# Altium PCB PCB1 (1).PcbDoc
Units mm, origin at the board's own origin, x right, y up, seen from the top; angles counter-clockwise.
Board outline 152.4 x 101.6 mm, 4 copper layers (Top Layer, +5 V, -5 V, GND), stack 1.615 mm thick; 59 components, 31 nets, 169 pads, 52 vias.
Unrouted connection lines stored in the file: 41.
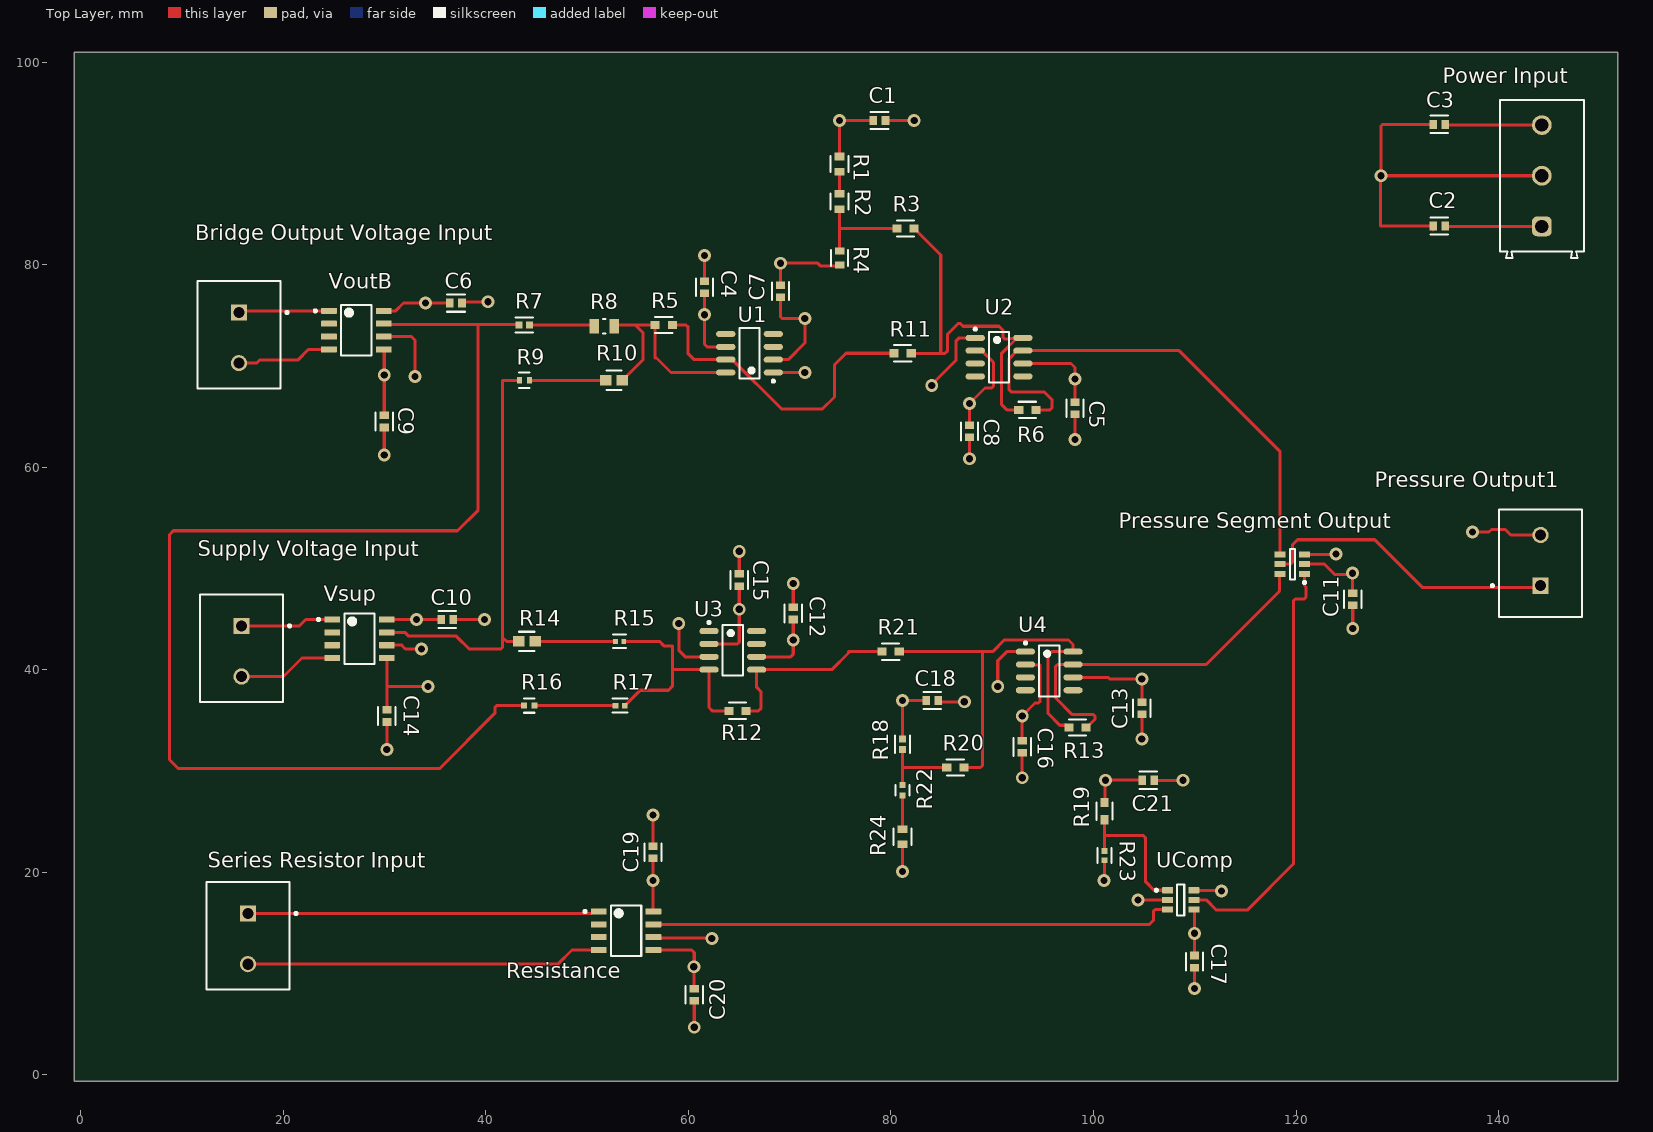
[diagram p0: Top Layer view]
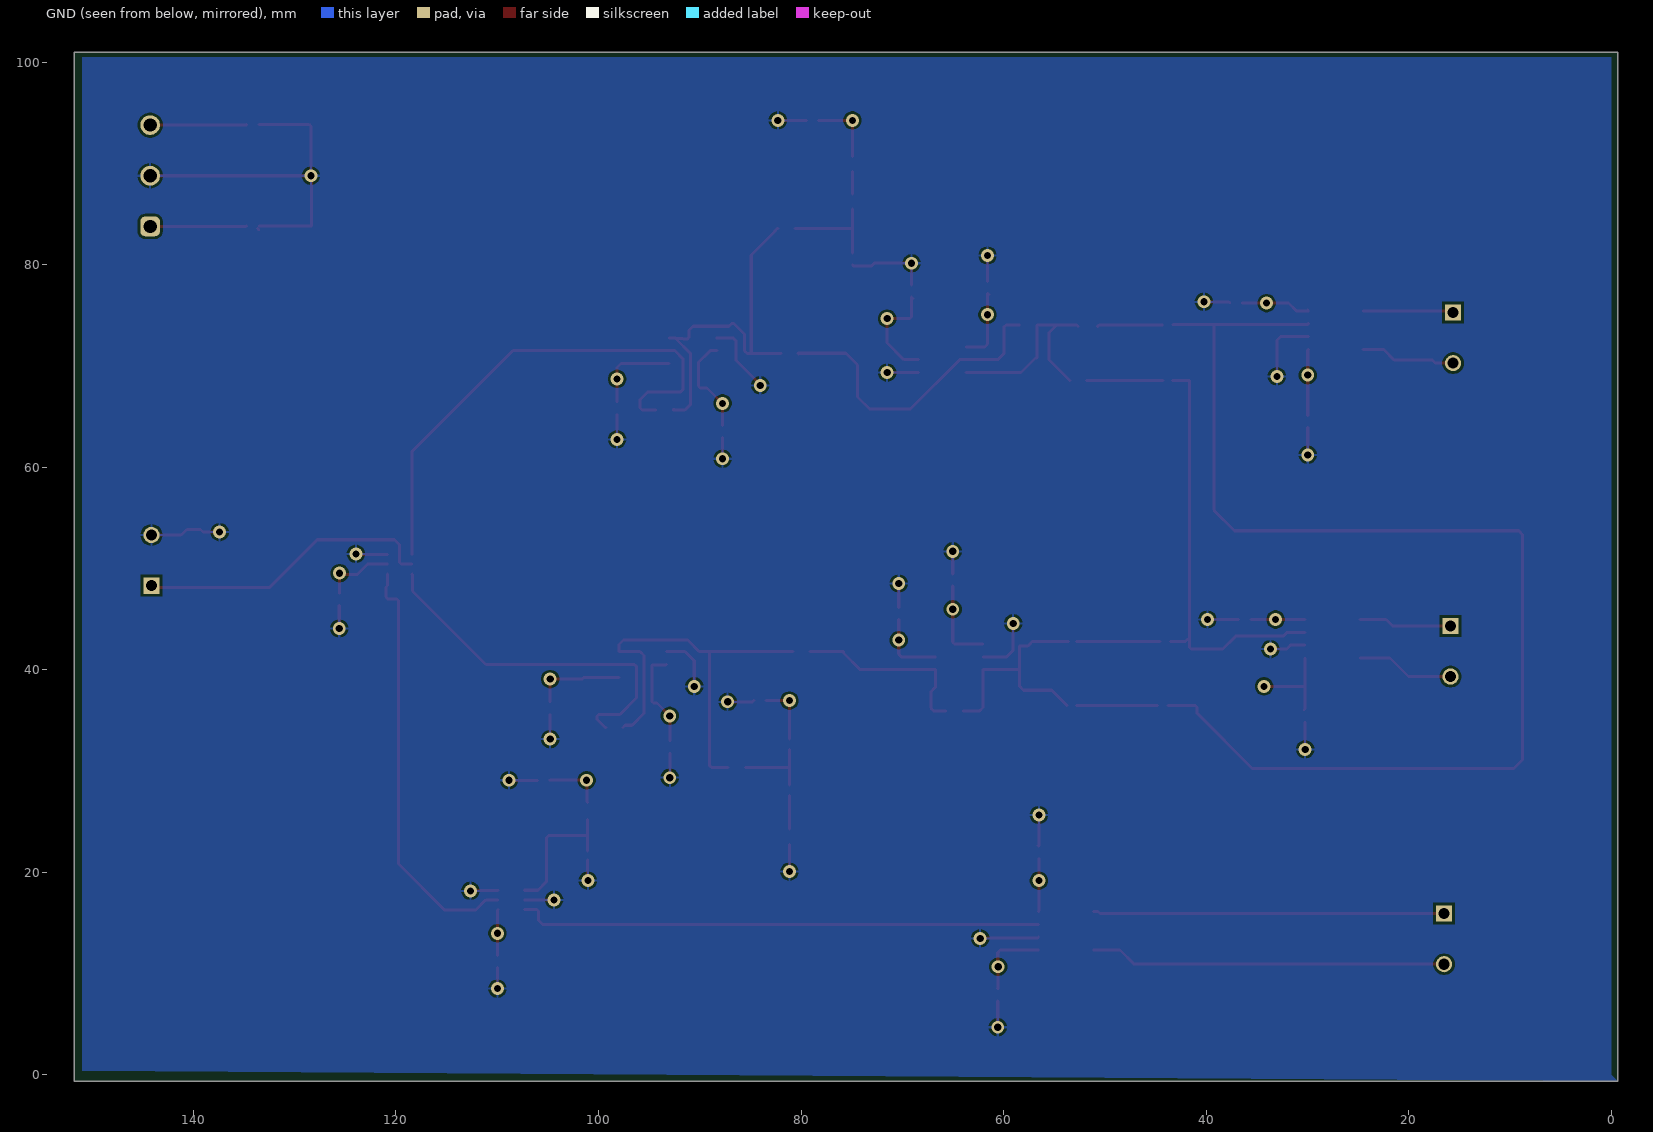
[diagram p1: GND view, seen from below]
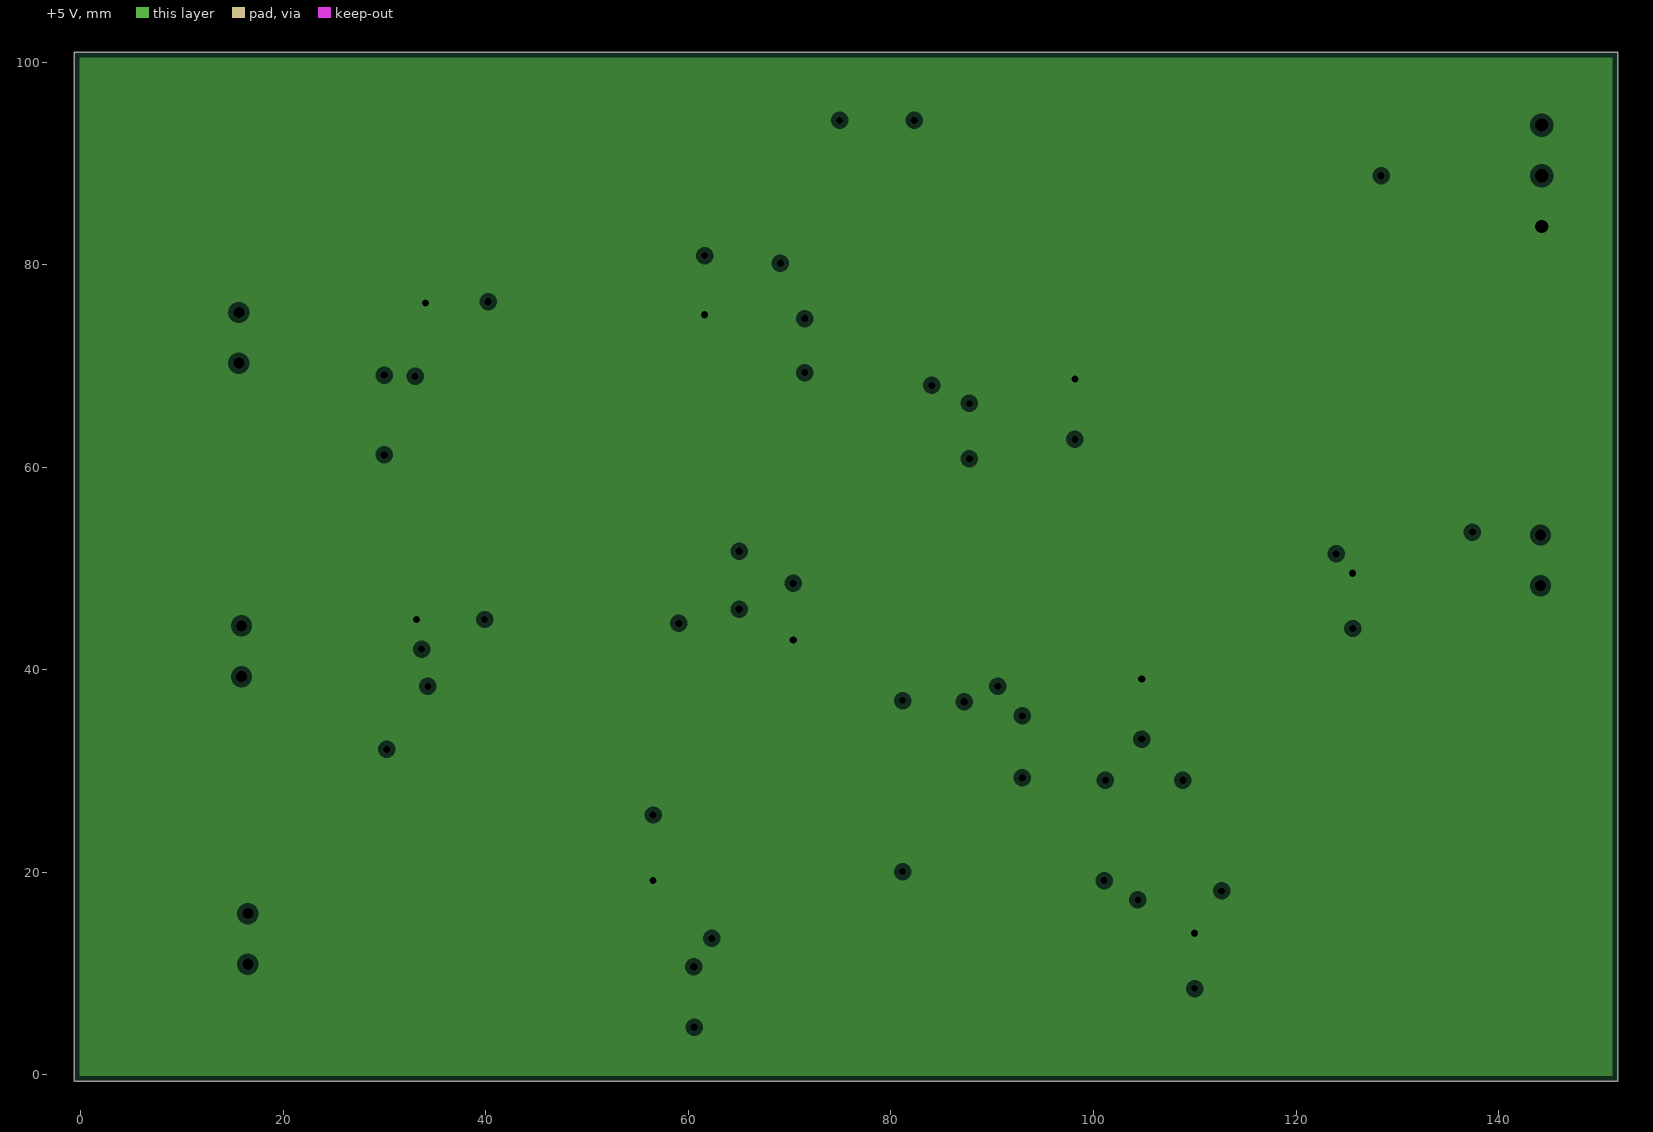
[diagram p2: +5 V, clearances drawn from the general rule]
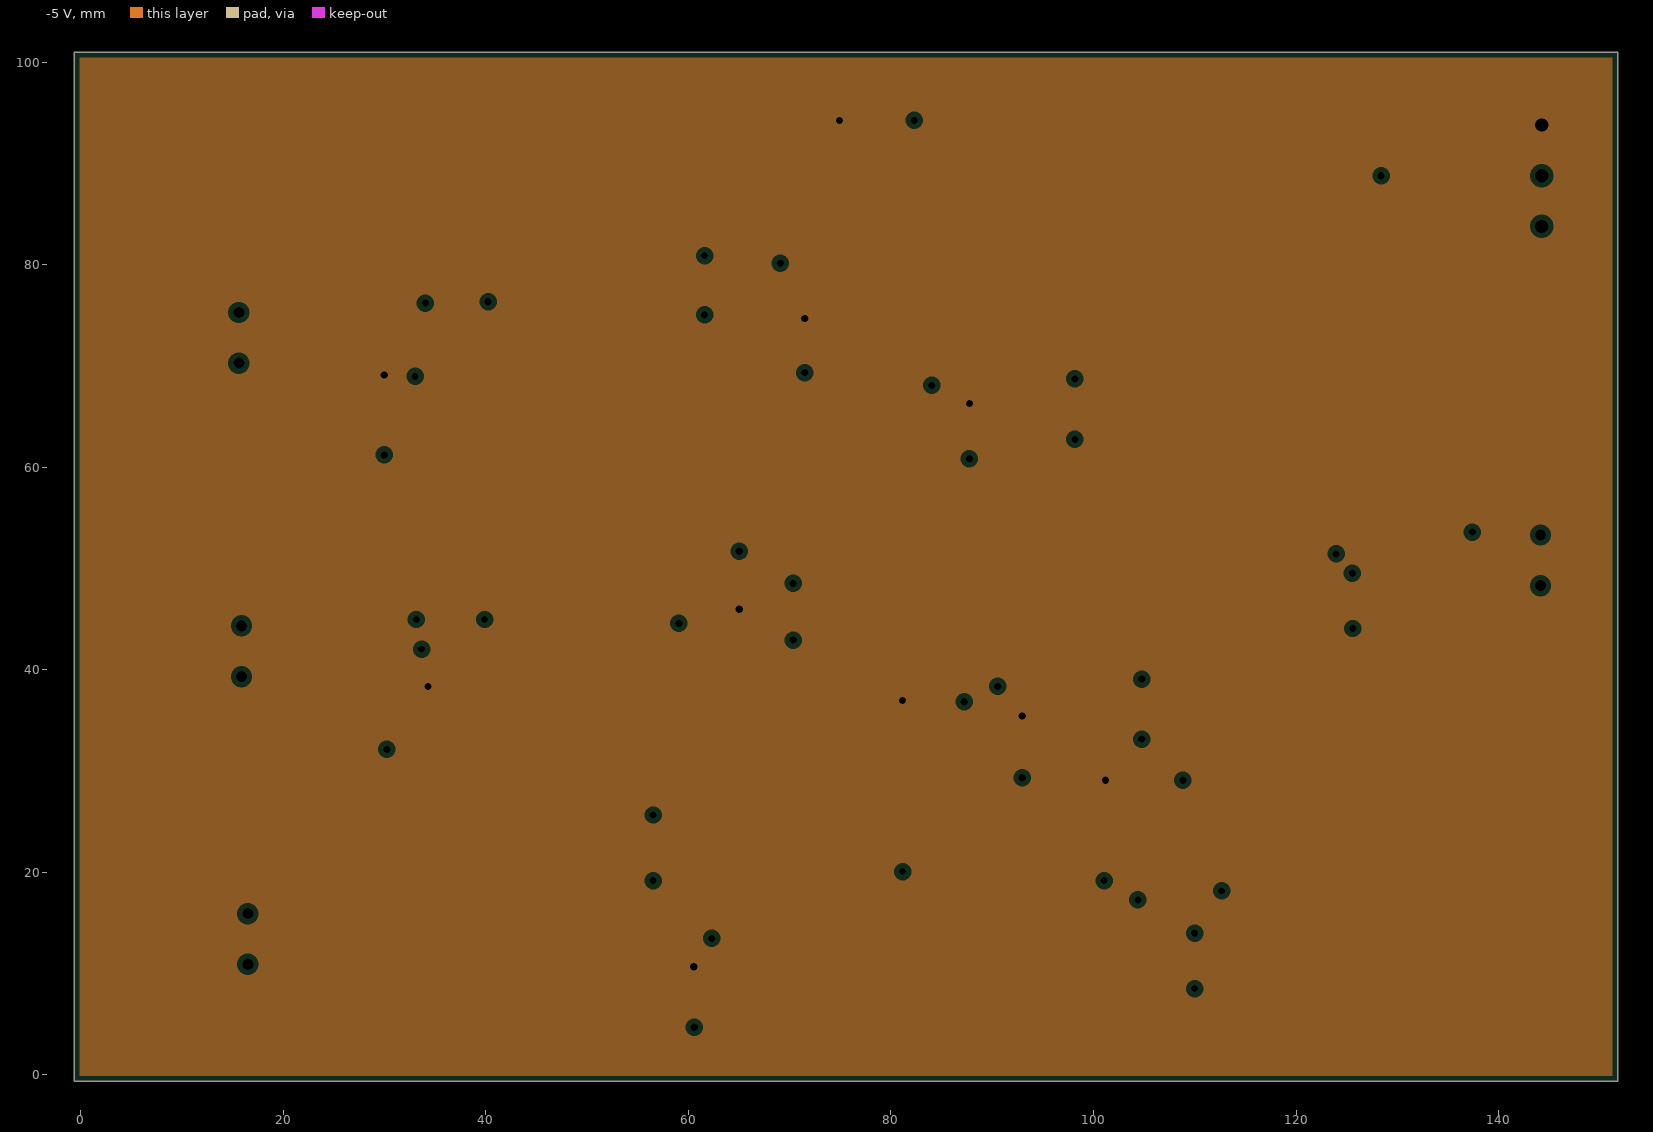
[diagram p3: -5 V, clearances drawn from the general rule]
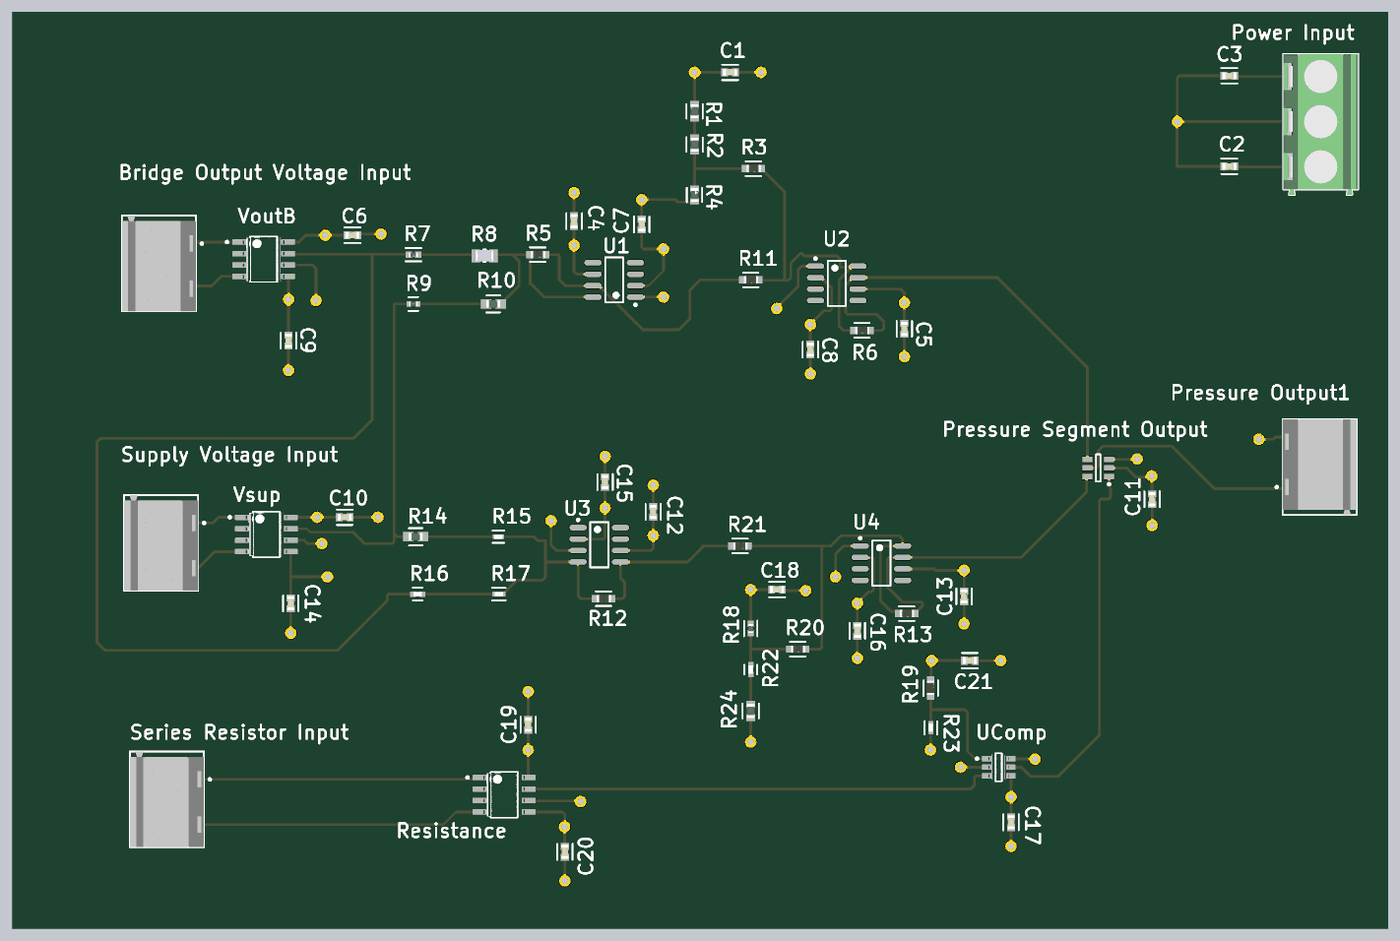
[diagram p4: 3D render of the assembled board from above, using the file's embedded part models]

## Layer stack, top to bottom
Top Solder: solder mask 0.0102, Solder Resist, Dk 3.5
Top Layer: signal copper 0.0356
Dielectric 2: prepreg 0.137, PP-006, Dk 4.29
+5 V: plane copper 0.035, net +5
Dielectric 1: dielectric 1.2, FR-4, Dk 4.8
-5 V: plane copper 0.035, net -5
Dielectric 3: prepreg 0.137, PP-006, Dk 4.29
GND: signal copper 0.0356
Bottom Solder: solder mask 0.0102, Solder Resist, Dk 3.5

## Board outline
-0.635,-0.635 151.765,-0.635 151.765,100.965 -0.635,100.965

## Design rules (kind name [scope] priority, off if disabled: settings)
Clearance [All] p1: gap=0.254 ignorepadtopadclearanceinfootprint=FALSE
MinimumSolderMaskSliver [All] p1: minsoldermaskwidth=0.1
PlaneClearance [All] p1: clearance=0.508
PlaneConnect [All] p1: planeconnectstyle=Relief reliefexpansion=0.508 reliefentries=4 reliefconductorwidth=0.254 reliefairgap=0.254
PolygonConnect [All] p1: connectstyle=Relief reliefconductorwidth=0.254 reliefentries=4 polygonreliefangle="90 Angle" airgapwidth=0.254
RoutingVias [All] p1: holewidth=0.711 width=1.27 viastyle="Through Hole" minholewidth=0.711 minwidth=1.27 maxholewidth=0.711 maxwidth=1.27
SolderMaskExpansion [All] p1: expansion=0.102 istentingtop=FALSE
Width [All] p1: maxlimit=0.4 minlimit=0.254 preferedwidth=0.3
27 further rules are at their usual default settings.

## Components (designator, comment, footprint, x,y, rotation, side; value= is the part's Value field where it differs from the comment)
"Bridge Output Voltage Input" "282836-2" TECO-282836-2_V 15.621,72.771 r270 top
C1 "0.1uf" FP-C0603C-CF-MFG 78.867,94.234 r0 top value="0.10 μF"
C2 "0.1uf" FP-C0603C-CF-MFG 134.147,83.82 r180 top value="0.10 μF"
C3 "0.1uf" FP-C0603C-CF-MFG 134.147,93.853 r180 top value="0.10 μF"
C4 "0.1uf" FP-C0603C-CF-MFG 61.595,77.759 r90 top value="0.10 μF"
C5 "0.1uf" FP-C0603C-CF-MFG 98.171,65.821 r270 top value="0.10 μF"
C6 "0.1uf" FP-C0603C-CF-MFG 37.049,76.2 r0 top value="0.10 μF"
C7 "0.1uf" FP-C0603C-CF-MFG 69.088,77.378 r90 top value="0.10 μF"
C8 "0.1uf" FP-C0603C-CF-MFG 87.757,63.535 r270 top value="0.10 μF"
C9 "0.1uf" FP-C0603C-CF-MFG 29.972,64.516 r270 top value="0.10 μF"
C10 "0.1uf" FP-C0603C-CF-MFG 36.195,44.958 r0 top value="0.10 μF"
C11 "0.1uf" FP-C0603C-CF-MFG 125.603,46.955 r270 top value="0.10 μF"
C12 "0.1uf" FP-C0603C-CF-MFG 70.358,45.558 r90 top value="0.10 μF"
C13 "0.1uf" FP-C0603C-CF-MFG 104.775,36.195 r270 top value="0.10 μF"
C14 "0.1uf" FP-C0603C-CF-MFG 30.226,35.433 r270 top value="0.10 μF"
C15 "0.1uf" FP-C0603C-CF-MFG 65.024,48.86 r90 top value="0.10 μF"
C16 "0.1uf" FP-C0603C-CF-MFG 92.964,32.385 r270 top value="0.10 μF"
C17 "0.1uf" FP-C0603C-CF-MFG 109.982,11.176 r270 top value="0.10 μF"
C18 "0.1uf" FP-C0603C-CF-MFG 84.074,36.957 r0 top value="0.10 μF"
C19 "0.1uf" FP-C0603C-CF-MFG 56.515,21.971 r90 top value="0.10 μF"
C20 "0.1uf" FP-C0603C-CF-MFG 60.579,7.909 r270 top value="0.10 μF"
C21 "0.1uf" FP-C0603C-CF-MFG 105.41,29.083 r0 top value="0.10 μF"
"Power Input" "691213710003" 691213710003 144.272,88.773 r90 top
"Pressure Output1" "282836-2" TECO-282836-2_V 144.145,50.8 r90 top
"Pressure Segment Output" "ADG819BRTZ-REEL7" ADI-RJ-6_N 119.634,50.419 r180 top
R1 "200" FP-CRCW0603-e3-MFG 74.93,89.928 r90 top value=200R
R2 "130" FP-CRCW0603-e3-MFG 74.93,86.233 r90 top value=130R
R3 "10k" FP-RT0603-MFG 81.446,83.566 r0 top value=10KΩ
R4 "4700" FP-MCT0603-MFG 74.93,80.651 r90 top
R5 "10k" FP-RT0603-MFG 57.57,74.041 r0 top value=10KΩ
R6 "10k" FP-RT0603-MFG 93.472,65.659 r0 top value=10KΩ
R7 "1.2k" FP-RG1005-IPC_A 43.809,74.041 r0 top value=1.2kR
R8 "30" FP-CRCW0805-e3-MFG 51.689,73.914 r0 top value=30Ω
R9 "11300" FP-RP73P-1E-MFG 43.806,68.58 r0 top value=11.3Ω
R10 "10" FP-CRCW0603-e3-IPC_A 52.652,68.58 r0 top value=10R
R11 "10k" FP-RT0603-MFG 81.153,71.247 r0 top value=10KΩ
R12 "10k" FP-RT0603-MFG 64.858,35.941 r0 top value=10KΩ
R13 "10k" FP-RT0603-MFG 98.425,34.29 r0 top value=10KΩ
R14 "23200" FP-CRCW0603-e3-IPC_A 44.052,42.799 r0 top value=10R
R15 "20" FP-CRCW0402-e3-IPC_C 53.213,42.799 r0 top value=20R
R16 "1k" FP-CRCW0402-e3-MFG 44.275,36.449 r0 top value=1kR
R17 "160" FP-CRCW0402-e3-IPC_B 53.269,36.449 r0 top value=160R
R18 "1.2k" FP-RG1005-IPC_A 81.153,32.639 r90 top value=1.2kR
R19 "10k" FP-RT0603-MFG 101.092,26.035 r90 top value=10KΩ
R20 "10k" FP-RT0603-MFG 86.36,30.353 r0 top value=10KΩ
R21 "10k" FP-RT0603-MFG 79.971,41.783 r0 top value=10KΩ
R22 "1k" FP-CRCW0402-e3-MFG 81.153,28.084 r90 top value=1kR
R23 "160" FP-CRCW0402-e3-IPC_B 101.092,21.646 r90 top value=160R
R24 "130" FP-CRCW0603-e3-MFG 81.153,23.507 r270 top value=130R
Resistance "INA819IDR" FP-D0008A-MFG 53.848,14.224 r0 top
"Series Resistor Input" "282836-2" TECO-282836-2_V 16.51,13.422 r270 top
"Supply Voltage Input" "282836-2" TECO-282836-2_V 15.875,41.823 r270 top
U1 "OP727ARZ" ADI-R-8_L 66.04,71.247 r180 top
U2 "OP727ARZ" ADI-R-8_L 90.678,70.866 r0 top
U3 "OP727ARZ" ADI-R-8_L 64.389,41.91 r0 top
U4 "OP727ARZ" ADI-R-8_L 95.631,39.878 r0 top
UComp "TLV3501AIDBVT" FP-DBV0006A-MFG 108.615,17.272 r0 top
VoutB "INA819IDR" FP-D0008A-MFG 27.211,73.533 r0 top
Vsup "INA819IDR" FP-D0008A-MFG 27.526,43.053 r0 top

## Footprints (in the part's own frame and the unit in brackets; to place one, negate y for a bottom-side part, rotate by r counter-clockwise, add the part's x,y. Pads: shape width x height; smd on the part's side, far side on the other; paste and mask are expansions set on the pad)
691213710003 [mm] "5,00mm - modular - green - Horizontal entry with rising cage clamp -  10,0mm height - 03p"
  rrect50% 1.95x1.95 hole 1.3: 1(-5,0)
  round 1.95 hole 1.3: 2(0,0) 3(5,0)
  silkscreen extent -8.1,-4.15 7.5,4.15, body extent -8.1,-4.15 7.5,4.15, height 10.05
ADI-R-8_L [mm] "SOIC, 8-Leads, Body 4.9x3.9mm, Pitch 1.27mm, IPC High Density"
  oval 1.9x0.6 smd: 1(-2.35,1.905) 2(-2.35,0.635) 3(-2.35,-0.635) 4(-2.35,-1.905) 5(2.35,-1.905) 6(2.35,-0.635) 7(2.35,0.635) 8(2.35,1.905)
  silkscreen extent -2.48,-2.5 1,2.88, body extent -2,-2.5 2,2.5, height 1.75
ADI-RJ-6_N [mm] "SOT23, 6-Leads, Body 2.9x1.6mm, Pitch 0.95mm, IPC Medium Density"
  rect 1.1x0.6 smd: 1(-1.2,0.95) 2(-1.2,0) 3(-1.2,-0.95) 4(1.2,-0.95) 5(1.2,0) 6(1.2,0.95)
  silkscreen extent -1.33,-1.5 0.25,1.92, body extent -0.85,-1.5 0.85,1.5, height 1.45
FP-C0603C-CF-MFG [mm]
  rect 0.75x0.9 smd paste+0 mask+0: 1(-0.6,0) 2(0.6,0)
  silkscreen extent -0.87,-0.85 0.88,0.85, body extent -1.2,-0.6 1.2,0.6, height 0.25
FP-CRCW0402-e3-IPC_B [mm]
  rect 0.568x0.572 smd paste+0 mask+0: 1(-0.452,0) 2(0.452,0)
  silkscreen extent -0.74,-0.69 0.74,0.69, body extent -0.89,-0.44 0.89,0.44, height 0.25
FP-CRCW0402-e3-IPC_C [mm]
  rect 0.468x0.472 smd paste+0 mask+0: 1(-0.402,0) 2(0.402,0)
  silkscreen extent -0.64,-0.67 0.64,0.67, body extent -0.74,-0.38 0.74,0.38, height 0.25
FP-CRCW0402-e3-MFG [mm]
  rect 0.6x0.6 smd paste+0 mask+0: 1(-0.525,0) 2(0.525,0)
  silkscreen extent -0.52,-0.7 0.53,0.7, body extent -0.92,-0.4 0.92,0.4, height 0.25
FP-CRCW0603-e3-IPC_A [mm]
  rect 1.135x1.062 smd paste+0 mask+0: 1(-0.815,0) 2(0.815,0)
  silkscreen extent -0.75,-0.95 0.75,0.95, body extent -1.88,-1.03 1.88,1.03, height 0.25
FP-CRCW0603-e3-MFG [mm]
  rect 0.75x1 smd paste+0 mask+0: 1(-0.75,0) 2(0.75,0)
  silkscreen extent -0.8,-0.9 0.8,0.9, body extent -1.22,-0.6 1.22,0.6, height 0.25
FP-CRCW0805-e3-MFG [mm]
  rect 0.95x1.45 smd paste+0 mask+0: 1(-0.975,0) 2(0.975,0)
  silkscreen extent -0.13,-0.7 0.13,0.7, body extent -1.55,-0.82 1.55,0.82, height 0.25
FP-D0008A-MFG [mm]
  rrect17% 1.55x0.6 smd paste+0 mask+0: 1(-2.7,1.905) 2(-2.7,0.635) 3(-2.7,-0.635) 4(-2.7,-1.905) 5(2.7,-1.905) 6(2.7,-0.635) 7(2.7,0.635) 8(2.7,1.905)
  silkscreen extent -4.17,-2.5 1.5,2.5, body extent -3.57,-2.75 3.57,2.75, height 0.25
FP-DBV0006A-MFG [mm]
  rrect17% 1.1x0.6 smd paste+0 mask+0: 1(-1.3,0.95) 2(-1.3,0) 3(-1.3,-0.95) 4(1.3,-0.95) 5(1.3,0) 6(1.3,0.95)
  silkscreen extent -2.52,-1.53 0.35,1.53, body extent -1.95,-1.78 1.95,1.78, height 0.25
FP-MCT0603-MFG [mm]
  rect 0.7x0.95 smd paste+0 mask+0: 1(-0.675,0) 2(0.675,0)
  silkscreen extent -0.8,-0.85 0.8,0.85, body extent -1.12,-0.58 1.12,0.58, height 0.25
FP-RG1005-IPC_A [mm]
  rect 0.689x0.672 smd paste+0 mask+0: 1(-0.514,0) 2(0.514,0)
  silkscreen extent -0.86,-0.74 0.86,0.74, body extent -1.06,-0.54 1.06,0.54, height 0.25
FP-RP73P-1E-MFG [mm]
  rect 0.5x0.6 smd paste+0 mask+0: 1(-0.5,0) 2(0.5,0)
  silkscreen extent -0.53,-0.77 0.53,0.75, body extent -0.85,-0.4 0.85,0.4, height 0.25
FP-RT0603-MFG [mm]
  rect 0.9x0.8 smd paste+0 mask+0: 1(-0.85,0) 2(0.85,0)
  silkscreen extent -0.85,-0.81 0.86,0.8, body extent -1.4,-0.55 1.4,0.55, height 0.25
TECO-282836-2_V [mm] "Female Header, Pitch 5mm, 1 x 2 Position, Height 10mm"
  rect 1.6x1.6 hole 1.1: 1(-2.5,0)
  round 1.6 hole 1.1: 2(2.5,0)
  silkscreen extent -5.6,-4.1 5,4.88, body extent -5.6,-4.1 5,4.1, height 10

## Part data
"Bridge Output Voltage Input" "Pressure Output1" "Series Resistor Input" "Supply Voltage Input": library part CMP-1684-00017-1, "Female Header, Pitch 5 mm, 1 x 2 Position, Height 10 mm, Tail Length 3.5 mm, Rohs, Bulk", Color=Green, Current=13.5A, Manufacturer="TE Connectivity", Package Description="Female Header, Pitch 5 mm, 1 x 2 Position, Height 10 mm, Tail Length 3.5 mm", Package Reference=THD, Standard Package=300, Voltage=300V, 3D Model=282836-2.pdf, Category=Connectors,Interconnects, Clamp Material - Plating=Brass-NickelPlated, Contact Material - Plating=Brass-TinPlated, Datasheet URL=http://www.te.com.cn/commerce/DocumentDelivery/DDEController?Action=showdoc&DocId=Catalog+Section%7F1308389_EUROSTYLE_TERMINAL_BLOCKS%7F0607%7Fpdf%7FEnglish%7FENG_CS_1308389_EUROSTYLE_TERMINAL_BLOCKS_0607.pdf%7F282836-2, Dynamic Catalog=BuchananSeries, Family=TerminalBlocks-WiretoBoard, Featured Product=EurostyleTerminalBlockConnectors, Features=Interlocking(Side), Housing Material=Polyamide(PA66),Nylon6/6, Manufacturer URL=http://www.te.com, Mating Orientation=HorizontalwithBoard, Mounting Type=ThroughHole, Number of Levels=1, Other Names="5ULV-02B / A98076", Packaging=Bulk, Pitch="0.197\"(5.00mm)", Positions Per Level=2, Product Training Modules=Wire-to-BoardEurostyleTerminalBlocks, RoHS Information=282836-2StatementofCompliance, Screw Material - Plating=Brass-NickelPlated, Screw Thread=M3, Series=Buchanan, Torque - Screw=0.68Nm(6Lb-In), Wire Gauge=16-30AWG, Wire Termination=Screw-RisingCageClamp
C1 C2 C3 C4 C5 C6 C7 C8 C9 C10 C11 C12 C13 C14 C15 C16 C17 C18 C19 C20 C21: library part CMP-2006-03061-2, "CAP CER 0.1UF 50V X7R 0603", Capacitance="0.10 μF", Manufacturer=KEMET, Manufacturer Part Number=C0603C104K5RACTU, Package=C0603C-CF, Temperature="-55°C to +125°C", Temperature Characteristic=X7R, Temperature Coefficient=30ppm/°C, Temperature Range High=+125°C, Temperature Range Low=-55°C, Tolerance=0.1, Voltage Rating="50 V", Automotive=Yes, Automotive Grade="Grade 1", Category=Cap, ComponentLink2Description=Datasheet, ComponentLink2URL=https://api.kemet.com/component-edge/download/datasheet/C0603C100J5GACAUTO.pdf, Device Class L1="Passive Components", Device Class L2=Capacitors, Device Class L3="Ceramic Capacitors", Digikey Description="CAP CER 0.1UF 50V X7R 0603", Height=0.87mm, Lead Free=Yes, Material=Ceramic, Octopart=https://octopart.com/c0603c104k5ractu-kemet-139244, RoHS=TRUE
"Power Input": library part CMP-1502-02527-2, Color=Green, Current=10A, Max Operating Temperature=105°C, Min Operating Temperature=-40°C, Voltage=300V, Connector Type="PCB, Terminal Block", Contact Material=Brass, Contact Plating=Tin, Height=10mm, Housing Material=Nylon, Lead Pitch=5mm, Length=8.3mm, Mount="Through Hole", NexarPartId=8917719, Number of Contacts=3, Number of Levels=1, Number of Pins=3, Number of Positions Per Level=3, Packaging=Box, Pitch=5.0038mm, Plating="Brass, Steel", REACH SVHC=Unknown, RoHS=Compliant, Stripping Length=-7mm, Termination=Screw, Width=15.6mm, Wire Gauge (Max)=26AWG, Wire Gauge (Min)=16AWG, Wire/Cable Gauge=16AWG
"Pressure Segment Output": library part CMP-0790-00095-1, "0.5 Ohm, CMOS, 1.8 to 5.5 V, 2:1 Mux / SPDT Switch, -40 to 125 degC, 6-pin SOT23 (RJ-6), Reel", Manufacturer="Analog Devices", Power Dissipation=5uW, # Sw Functions=1, Code_JEDEC=MO-178-AB, ComponentLink1Description="Manufacturer URL", ComponentLink1URL=http://www.analog.com/en/index.html, ComponentLink2Description=Datasheet, ComponentLink2URL=http://www.analog.com/static/imported-files/data_sheets/ADG819.pdf, ComponentLink3Description="Package Specification", ComponentLink3URL=http://www.analog.com/static/imported-files/packages/PKG_PDF/SOT-23(RJ)/RJ_6.pdf, Configuration=SPDT, DatasheetVersion=02-03-2012-A, Id, Is (ON)="10pA, 10pA", Is OFF="10pA, 10pA", Max Pos Supply=5.5V, Min Pos Supply=1.8V, Mounting Technology="Surface Mount", PackageDescription="6-Pin Small Outline Transistor Package, Body 2.9 x 1.6 mm, Pitch 0.95 mm", PackageReference=RJ-6, PackageVersion="121608-A, 12/2008", Packing=Reel, PartNumber=ADG819BRTZ-REEL7, Ron (ohms)=0.5
R1: library part CMP-2000-03062-2, "RES Thick Film, 200Ω, 1%, 0.1W, 100ppm/°C, 0603", Case Code (Imperial)=0603, Case Code (Metric)=1608, Max Operating Temperature=155°C, Min Operating Temperature=-55°C, Package Quantity=5000, Power Rating=100mW, Resistance=200R, Temperature Coefficient=100ppm/°C, Tolerance=1%, Voltage Rating=75V, Case/Package=0603, Composition="Thick Film", Contact Plating=Tin, Depth=0.85mm, Height=0.45mm, Lead Free="Lead Free", Length=1.55mm, Military Standard=Not, Number of Pins=2, Packaging="Tape and Reel", Termination=SMD/SMT, Voltage Rating (DC)=75V, Weight=7.1E-05oz, Width=0.85mm
R2 R24: library part CMP-2000-03889-2, "RES Thick Film, 130Ω, 1%, 0.1W, 100ppm/°C, 0603", Case Code (Imperial)=0603, Case Code (Metric)=1608, Max Operating Temperature=155°C, Max Power Dissipation=100mW, Min Operating Temperature=-55°C, Package Quantity=10, Resistance=130R, Temperature Coefficient=100ppm/°C, Tolerance=1%, Voltage Rating=75V, Case/Package=0603, Composition="Thick Film", Contact Plating=Tin, Depth=0.85mm, Features="Automotive AEC-Q200", Height=0.45mm, Lead Free="Lead Free", Length=1.55mm, Military Standard=Not, Number of Pins=2, Number of Terminations=2, Packaging="Tape and Reel", Power Rating=100mW, Radiation Hardening=No, Termination=SMD/SMT, Voltage Rating (DC)=75V, Weight=7.1E-05oz, Width=0.85mm, Working Voltage=75V
R3 R5 R6 R11 R12 R13 R19 R20 R21: library part CMP-03412-005349-1, "RES SMD 10K OHM 1% 1/10W 0603", Manufacturer=Yageo, Manufacturer Part Number=RT0603FRE0710KL, Package=RT0603, Power Rating=0.1W, Resistance=10KΩ, Temperature="-55°C to +155°C", Temperature Coefficient="50 ppm/°C", Temperature Range High=+155°C, Temperature Range Low=-55°C, Tolerance=0.01, Voltage Rating=75V, Automotive=No, Category=Res, ComponentLink2Description=Datasheet, ComponentLink2URL=http://www.yageo.com/documents/recent/PYu-RT_1-to-0.01_RoHS_L_9.pdf, Composition="Thin Film", Device Class L1="Passive Components", Device Class L2=Resistors, Device Class L3="Chip SMD Resistors", Digikey Description="RES SMD 10K OHM 1% 1/10W 0603", Footprint Url=http://www.yageo.com/exep/pages/download/literatures/PYu-R_Mount_10.pdf, Height=0.55mm, Ipc Land Pattern Name=RESC16080X45, Lead Free=Yes, Mouser Description="Thin Film Resistors - SMD 10K ohm 1% 1/10W", Octopart=https://octopart.com/rt0603fre0710kl-yageo-40009243, RoHS=TRUE, Series=RT
R4: library part CMP-02407-006571-1, "RES SMD 100 OHM 1% 1/8W 0603", Case/Package=0603, Max Operating Temperature=125°C, Min Operating Temperature=-55°C, Power Rating=100mW, Resistance=4.7kR, Temperature Coefficient=25ppm/°C, Tolerance=0.1%, Composition="Thin Film", Contact Plating=Tin, Depth=0.85mm, Height=0.45mm, Lead Free="Lead Free", Length=1.55mm, Military Standard=Not, Mount="Surface Mount", Packaging="Tape and Reel", Radiation Hardening=No, Width=850um
R7: library part CMP-28537-003800-1, "Automotive Metal Thin Film Chip Resistor, 0402, 1.2kΩ, 0.05%, 25ppm/°C, 0.0625W, 75V /  / Actually TNPW04021K20BYEP", Case Code (Imperial)=0402, Case Code (Metric)=1005, Max Operating Temperature=155°C, Max Power Dissipation=63mW, Min Operating Temperature=-55°C, Package Quantity=5000, Power Rating=30mW, Resistance=1.2kR, Resistor Type="Thin Film", Temperature Coefficient=25ppm/°C, Tolerance=0.05%, Voltage Rating=25V, Case/Package=0402, Features="Automotive AEC-Q200", Height=0.35mm, Lead Free="Lead Free", Length=1mm, Number of Terminations=2, Packaging="Tape and Reel", RoHS Compliant=Yes, Series=RG, Termination=SMD/SMT, Voltage Rating (DC)=25V, Width=0.5mm
R8: library part CMP-2001-03810-2, "RES SMD 30 OHM 1% 1/8W 0805", Manufacturer=Vishay, Manufacturer Part Number=CRCW080530R0FKEA, Package=CRCW0805-e3, Power Rating=0.125W, Resistance=30Ω, Temperature="-55°C to +155°C", Temperature Coefficient=100ppm/°C, Temperature Range High=+155°C, Temperature Range Low=-55°C, Tolerance=1%, Voltage Rating=150V, Automotive=Yes, Automotive Grade="Grade 0", Category=Res, ComponentLink2Description=Datasheet, ComponentLink2URL=https://www.vishay.com/docs/20035/dcrcwe3.pdf, Composition="Thick Film", Device Class L1="Passive Components", Device Class L2=Resistors, Device Class L3="Chip SMD Resistors", Digikey Description="RES SMD 30 OHM 1% 1/8W 0805", Height=0.5mm, Ipc Land Pattern Name=RESC200125X45, Lead Free=Yes, Mouser Description="Thick Film Resistors - SMD 1/8watt 30ohms 1%", Octopart=https://octopart.com/crcw080530r0fkea-vishay-39861726, RoHS=TRUE, Series=CRCW
R9: library part CMP-03211-001549-1, "RP73P 0402 11.3Ω 0.1W 25ppm/°C 0.10% 50V", Manufacturer="TE Connectivity", Manufacturer Part Number=RP73PF1E11R3BTDF, Package=RP73P-1E, Power Rating=0.1W, Resistance=11.3Ω, Temperature="-55°C to +155°C", Temperature Coefficient=25ppm/°C, Temperature Range High=+155°C, Temperature Range Low=-55°C, Tolerance=0.10%, Voltage Rating=50V, Automotive=No, Category=Res, ComponentLink2Description=Datasheet, ComponentLink2URL=https://www.te.com/commerce/DocumentDelivery/DDEController?Action=srchrtrv&DocNm=1773272&DocType=DS&DocLang=English, Composition="Thin Film", Device Class L1="Passive Components", Device Class L2=Resistors, Device Class L3="Chip SMD Resistors", Height=0.35mm, Ipc Land Pattern Name=RESC10050X30, Lead Free=Yes, Octopart=https://octopart.com/rp73pf1e11r3btdf-te+connectivity-89154032, RoHS=TRUE, Series=RP73P
R10: library part CMP-2000-03845-2, "RES Thick Film, 10Ω, 1%, 0.1W, 100ppm/°C, 0603", Case Code (Imperial)=0603, Case Code (Metric)=1608, Max Operating Temperature=155°C, Max Power Dissipation=100mW, Min Operating Temperature=-55°C, Resistance=10R, Temperature Coefficient=100ppm/°C, Tolerance=1%, Voltage Rating=75V, Case/Package=0603, Composition="Thick Film", Contact Plating=Tin, Depth=0.85mm, Features="Automotive AEC-Q200", Height=0.45mm, Lead Free="Lead Free", Length=1.55mm, Military Standard=Not, Mount="Surface Mount", Number of Pins=2, Number of Terminations=2, Package Quantity=10, Packaging="Tape and Reel", Power Rating=100mW, Termination=SMD/SMT, Voltage Rating (DC)=75V, Weight=7.1E-05oz, Width=0.033inch
R14: library part CMP-2000-03845-2, "RES Thick Film, 10Ω, 1%, 0.1W, 100ppm/°C, 0603 /  / Should be RMCF0603FT23K2", Case Code (Imperial)=0603, Case Code (Metric)=1608, Max Operating Temperature=155°C, Max Power Dissipation=100mW, Min Operating Temperature=-55°C, Package Quantity=10, Resistance=10R, Temperature Coefficient=100ppm/°C, Tolerance=1%, Voltage Rating=75V, Case/Package=0603, Composition="Thick Film", Contact Plating=Tin, Depth=0.85mm, Features="Automotive AEC-Q200", Height=0.45mm, Lead Free="Lead Free", Length=1.55mm, Military Standard=Not, Mount="Surface Mount", Number of Pins=2, Number of Terminations=2, Packaging="Tape and Reel", Power Rating=100mW, Termination=SMD/SMT, Voltage Rating (DC)=75V, Weight=7.1E-05oz, Width=0.033inch
R15: library part CMP-2002-08359-2, "RES Thick Film, 20Ω, 1%, 0.063W, 100ppm/°C, 0402", Case Code (Imperial)=0402, Case Code (Metric)=1005, Max Operating Temperature=155°C, Max Power Dissipation=63mW, Min Operating Temperature=-55°C, Package Quantity=10, Resistance=20R, Temperature Coefficient=100ppm/°C, Tolerance=1%, Voltage Rating=50V, Case/Package=0402, Composition="Thick Film", Contact Plating=Tin, Depth=0.5mm, Features="Automotive AEC-Q200", Height=0.35mm, Lead Free="Lead Free", Length=1mm, Military Standard=Not, Mount="Surface Mount", Number of Terminations=2, Packaging="Tape and Reel", Power Rating=63mW, Radiation Hardening=No, Termination=SMD/SMT, Voltage Rating (DC)=50V, Weight=2.3E-05oz, Width=0.02inch
R16 R22: library part CMP-2002-08276-2, "RES Thick Film, 1kΩ, 1%, 0.063W, 100ppm/°C, 0402", Case Code (Imperial)=0402, Case Code (Metric)=1005, Max Operating Temperature=155°C, Max Power Dissipation=63mW, Min Operating Temperature=-55°C, Package Quantity=10, Resistance=1kR, Temperature Coefficient=100ppm/°C, Tolerance=1%, Voltage Rating=50V, Case/Package=0402, Composition="Thick Film", Contact Plating=Tin, Depth=0.5mm, Features="Automotive AEC-Q200", Height=0.35mm, Lead Free="Lead Free", Length=1mm, Military Standard=Not, Mount="Surface Mount", Number of Pins=2, Number of Terminations=2, Packaging="Tape and Reel", Power Rating=63mW, Radiation Hardening=No, Termination=SMD/SMT, Voltage Rating (DC)=50V, Weight=2.3E-05oz, Width=0.5mm
R17 R23: library part CMP-2002-08228-2, "RES Thick Film, 160Ω, 1%, 0.063W, 100ppm/°C, 0402", Case Code (Imperial)=0402, Case Code (Metric)=1005, Max Operating Temperature=155°C, Max Power Dissipation=63mW, Min Operating Temperature=-55°C, Package Quantity=10, Resistance=160R, Temperature Coefficient=100ppm/°C, Tolerance=1%, Voltage Rating=50V, Case/Package=0402, Composition="Thick Film", Contact Plating=Tin, Depth=0.5mm, Features="Automotive AEC-Q200", Height=0.016inch, Length=1mm, Military Standard=Not, Number of Pins=2, Number of Terminations=2, Packaging="Tape and Reel", Power Rating=63mW, Radiation Hardening=No, Termination=SMD/SMT, Weight=2.3E-05oz, Width=0.02inch
R18: library part CMP-28537-003800-1, "Automotive Metal Thin Film Chip Resistor, 0402, 1.2kΩ, 0.05%, 25ppm/°C, 0.0625W, 75V", Case Code (Imperial)=0402, Case Code (Metric)=1005, Max Operating Temperature=155°C, Max Power Dissipation=63mW, Min Operating Temperature=-55°C, Package Quantity=5000, Power Rating=30mW, Resistance=1.2kR, Resistor Type="Thin Film", Temperature Coefficient=25ppm/°C, Tolerance=0.05%, Voltage Rating=25V, Case/Package=0402, Features="Automotive AEC-Q200", Height=0.35mm, Lead Free="Lead Free", Length=1mm, Number of Terminations=2, Packaging="Tape and Reel", RoHS Compliant=Yes, Series=RG, Termination=SMD/SMT, Voltage Rating (DC)=25V, Width=0.5mm
Resistance VoutB Vsup: library part CMP-04895-000469-1, "IC INST AMP 1 CIRCUIT 8SOIC"
U1 U2 U3 U4: library part CMP-0384-00649-1, "Double Channel Rail-to-Rail Operational Amplifier, 700 KHz BW, 200 mV/us SR, Industrial, 8-pin SOIC (R-8), Tube", Amplifiers Per Package=2, Generic Part Number=OP727, Input Bias Current=5.5nA, Input Offset Voltage=30uV, Manufacturer="Analog Devices", Code_JEDEC=MS-012-AA, ComponentLink1Description="Manufacturer URL", ComponentLink1URL=http://www.analog.com/en/index.html, ComponentLink2Description=Datasheet, ComponentLink2URL=http://www.analog.com/static/imported-files/data_sheets/OP777_727_747.pdf, ComponentLink3Description="Package Specification", ComponentLink3URL=http://www.analog.com/static/imported-files/packages/PKG_PDF/SOIC_Narrow%20(R)/R_8.pdf, DatasheetVersion="Rev. D", Iq/Amp=290uA, Mounting Technology="Surface Mount", PackageDescription="8-Pin Standard Small Outline Package, Body 3.9 x 4.9 mm, Pitch 1.27 mm", PackageReference=R-8, PackageVersion=060506-A, PartNumber=OP727ARZ, Slew Rate=200mV/us, Small Signal Bandwidth=700KHz, V Span Max=36V, V Span Min=3V
UComp: library part CMP-04896-000031-1, "IC COMP 4.5NS R-R HS SOT23-6", Ambient Temperature Range High=+125°C, Ambient Temperature Range Low=-40°C, Input Bias Current=0.000002uA, Input Offset Voltage=1mV, Manufacturer="Texas Instruments", Max Dual Supply Voltage=2.75V, Max Junction Temp=+150°C, Max Supply Voltage=5.5V, Min Dual Supply Voltage=1.35V, Min Supply Voltage=2.2V, Nominal Supply Current=3.2mA, Output Current Per Channel=74mA, Package=DBV0006A, Temperature="-40°C to +125°C", Automotive=No, Category=IC, ComponentLink2Description=Datasheet, ComponentLink2URL=https://www.ti.com/lit/ds/symlink/tlv3501.pdf, Device Class L1="Integrated Circuits (ICs)", Device Class L2="Linear ICs", Device Class L3=Comparators, Digikey Description="IC COMP 4.5NS R-R HS SOT23-6", Height=1.45mm, Lead Free=Yes, Manufacturer Part Number=TLV3501AIDBVT, Mouser Description="Analog Comparators 4.5ns Rail-to-Rail High Speed", Number Of Channels=1, Octopart=https://octopart.com/tlv3501aidbvt-texas+instruments-428399, RoHS=TRUE, Standoff Height=0mm, Temperature Range High=+125°C, Temperature Range Low=-40°C

## Via types
v1: diameter 1.27, hole 0.711, Top Layer to GND, 52 vias

## Nets (pads, with @x,y where several pads share a name; then routed paths per layer and width w, separated by ;. In a path a pad name is that pad's centre, name@x,y a point inside that pad or via, vN(x,y) a via of type N, cw(c..) or ccw(c..) an arc to the next point about the centre after c; other vN are vias at no path point)
+5: "Power Input.1" "Pressure Segment Output.2" C2.1 C4.1 C5.1 C6.1 C10.1 C11.1 C12.1 C13.1 C17.1 C19.1 Resistance.8 U1.6 U2.6 U3.6 U4.6 UComp.4 VoutB.8 Vsup.8 | length 71.3
  Top Layer w0.3: VoutB.8@29.974,75.501 VoutB.8 31.115,75.438 31.877,76.2 v1(34.036,76.2) C6.1 ; Vsup.8 v1(33.147,44.958) C10.1 ; C19.1 v1(56.515,19.177) 56.515,16.162 Resistance.8 ; C4.1@61.468,77.032 C4.1 v1(61.595,75.057) 61.595,73.375 61.592,73.372 61.592,72.139 61.849,71.882 U1.6 ; U3.6 68.813,41.275 68.816,41.272 70.101,41.272 70.358,41.529 v1(70.358,42.926) C12.1 ; U2.6 97.79,70.231 98.171,69.85 v1(98.171,68.707) C5.1 ; U4.6 101.439,39.243 101.601,39.081 v1(104.775,39.081) C13.1 ; UComp.4 109.982,16.255 v1(109.982,13.97) C17.1 ; 120.834,50.419 122.809,50.419 123.825,49.403 125.432,49.403 v1(125.564,49.535) 125.564,47.594 C11.1 ; C2.1 134.794,83.773 144.272,83.773
-5: "Power Input.3" C1.1 C3.1 C7.1 C8.1 C9.1 C14.1 C15.1 C16.1 C18.1 C20.1 C21.1 R1.2 R18.2 R19.2 Resistance.5 U1.2 U2.2 U3.2 U4.2 VoutB.5 Vsup.5 | length 91.1
  Top Layer w0.3: VoutB.5 29.972,71.567 v1(29.972,69.088) C9.1 ; Vsup.5 30.226,38.354 ; C14.1@30.353,36.033 30.226,36.16 30.226,38.354 ; v1(34.29,38.354) 30.226,38.354 ; Resistance.5 60.325,12.319 60.579,12.065 60.579,10.712 v1(60.54,10.673) 60.54,8.548 C20.1 ; U3.2 64.848,42.545 65.024,42.721 v1(65.024,45.974) C15.1 ; U1.2 69.85,70.612 71.504,72.266 71.504,73.245 71.501,73.248 v1(71.501,74.676) 69.264,74.676 69.088,74.852 C7.1 C7.1@68.961,76.651 ; R1.2 v1(74.93,94.234) C1.1 ; R18.2 v1(81.153,36.957) C18.1 ; C8.1 v1(87.757,66.294) 89.281,67.818 89.951,67.818 90.127,67.994 90.127,70.352 88.978,71.501 U2.2 ; C16.1 v1(92.964,35.433) 94.234,36.703 94.566,36.703 94.742,36.879 94.742,40.464 93.33,40.464 U4.2 ; R19.2 101.136,26.929 101.136,29.044 v1(101.18,29.088) 104.805,29.088 C21.1 ; C3.1 134.827,93.773 144.272,93.773
GND: "Power Input.2" "Pressure Output1.2" "Pressure Segment Output.3" C1.2 C2.2 C3.2 C4.2 C5.2 C6.2 C7.2 C8.2 C9.2 C10.2 C11.2 C12.2 C13.2 C14.2 C15.2 C16.2 C17.2 C18.2 C19.2 C20.2 C21.2 R4.1 R23.1 R24.2 Resistance.6 U1.1 U2.1 U3.3 U4.1 UComp.2 UComp.6 VoutB.6 Vsup.6 | length 149.8
  Top Layer w0.3: VoutB.6 32.639,72.898 33.02,72.517 v1(33.02,68.961) ; v1(29.972,61.214) C9.2 ; v1(30.226,32.131) C14.2 ; Vsup.6 31.701,42.418 31.877,42.242 31.877,42.213 32.053,42.037 v1(33.655,42.037) ; C10.2 v1(39.878,44.958) ; C6.2 37.776,76.327 v1(40.224,76.327) ; v1(56.515,25.654) C19.2 C19.2@56.603,22.659 ; Resistance.6 56.609,13.528 62.257,13.528 v1(62.318,13.467) ; v1(59.055,44.577) 59.055,41.91 59.69,41.275 U3.3 ; v1(60.579,4.699) C20.2 ; C4.2 v1(61.595,80.899) ; C15.2 v1(65.024,51.689) ; U1.1 v1(71.501,69.342) ; C7.2 v1(69.088,80.137) 72.771,80.137 73.025,79.883 74.837,79.883 R4.1 ; C12.2 v1(70.358,48.514) ; C1.2 v1(82.296,94.234) ; v1(81.153,20.066) R24.2 ; v1(84.035,68.077) 84.035,68.16 86.416,70.541 86.416,72.446 86.741,72.771 U2.1 ; C18.2 84.801,36.83 v1(87.249,36.83) ; v1(87.757,60.833) C8.2 ; v1(90.551,38.354) 90.551,40.894 91.44,41.783 U4.1 ; v1(92.964,29.337) C16.2 ; v1(98.171,62.738) C5.2 ; v1(101.053,19.182) 101.072,19.201 101.072,21.174 R23.1 ; v1(104.394,17.272) UComp.2 ; v1(104.775,33.147) C13.2 ; C21.2 v1(108.839,29.083) ; UComp.6 109.946,18.192 112.618,18.192 v1(112.649,18.161) ; v1(109.982,8.509) C17.2 ; 120.834,51.369 123.886,51.369 v1(123.952,51.435) ; C11.2 v1(125.603,44.069) v1@125.73,43.942 ; C2.2@133.547,83.439 C2.2@133.674,83.566 ; C2.2 128.358,83.82 128.358,88.734 v1(128.397,88.773) ; C3.2 128.573,93.853 128.397,93.677 v1(128.397,88.773) ; v1(137.414,53.594) 139.038,53.594 139.297,53.853 140.659,53.853 141.211,53.3 144.145,53.3 ; 144.272,88.773 131.699,88.773 131.696,88.776 128.4,88.776 v1(128.397,88.773)
"NetBridge Output Voltage Input_1": "Bridge Output Voltage Input.1" VoutB.1 | length 9
  Top Layer w0.3: 15.621,75.271 15.788,75.438 VoutB.1
"NetBridge Output Voltage Input_2": "Bridge Output Voltage Input.2" VoutB.4 | length 9.5
  Top Layer w0.3: 15.621,70.271 17.359,70.271 17.653,70.565 21.416,70.565 22.479,71.628 VoutB.4
"NetPressure Output1_1": "Pressure Output1.1" "Pressure Segment Output.5" | length 29.7
  Top Layer w0.3: 118.434,50.419 119.458,50.419 119.634,50.595 119.634,52.324 120.142,52.832 127.762,52.832 132.461,48.133 143.978,48.133 144.145,48.3
"NetPressure Segment Output_1": "Pressure Segment Output.1" UComp.5 | length 41.9
  Top Layer w0.3: UComp.5 111.125,17.272 112.141,16.256 115.189,16.256 119.761,20.828 119.761,46.814 119.937,46.99 120.812,46.99 120.988,47.166 120.988,48.165 120.834,48.319 120.834,49.469
"NetPressure Segment Output_4": "Pressure Segment Output.4" R6.2 U2.7 | length 51.5
  Top Layer w0.3: R6.2 95.709,65.659 95.885,65.835 95.885,66.675 95.123,67.437 91.87,67.437 91.674,67.633 91.674,70.719 92.456,71.501 U2.7 108.458,71.501 118.434,61.525 118.434,51.369
"NetPressure Segment Output_6": "Pressure Segment Output.6" R13.2 U4.7 | length 36.2
  Top Layer w0.3: R13.2 99.325,34.29 100.171,35.136 100.171,35.384 99.995,35.56 97.917,35.56 96.266,37.211 96.266,40.337 96.442,40.513 U4.7 111.125,40.513 118.364,47.752 118.364,49.399 118.434,49.469
NetR1_1: R1.1 R2.2 | length 2.2
  Top Layer w0.3: R2.2 R1.1
NetR2_1: R2.1 R3.1 R4.2 | length 10
  Top Layer w0.3: R4.2@74.93,81.164 74.93,83.566 ; R2.1 74.93,83.566 ; R3.1 74.93,83.566
NetR3_2: R3.2 R6.1 R11.2 U2.8 | length 37
  Top Layer w0.3: R11.2 82.049,71.201 84.921,71.201 ; R3.2 82.346,83.566 82.596,83.316 82.596,83.266 84.921,80.941 84.921,71.201 ; R6.1@92.544,65.737 R6.1 91.44,65.659 90.932,66.167 90.932,71.247 U2.8@92.399,72.714 ; U2.8 92.456,72.771 U2.8@92.399,72.714 ; 84.921,71.201 85.298,71.201 85.598,71.501 85.598,73.152 86.617,74.171 86.865,74.171 87.122,73.914 90.678,73.914 91.059,73.533 91.059,72.82 91.235,72.644 91.57,72.644 91.639,72.714 U2.8@92.399,72.714
NetR5_1: R5.1 R8.2 R10.2 U1.8 | length 21.6
  Top Layer w0.3: R8.2 52.791,74.041 54.755,74.041 ; R10.2 53.503,68.58 55.499,70.576 55.499,73.297 54.755,74.041 ; U1.8 58.293,69.342 56.847,70.788 56.72,70.788 R5.1 54.755,74.041
NetR5_2: R5.2 R11.1 U1.7 | length 31
  Top Layer w0.3: R5.2 59.768,74.041 59.944,73.865 59.944,71.247 60.579,70.612 U1.7 64.34,70.612 69.215,65.737 73.23,65.737 74.422,66.929 74.422,70.104 75.565,71.247 80.206,71.247 80.254,71.198 R11.1
NetR7_1: R7.1 R16.1 VoutB.7 | length 123.8
  Top Layer w0.3: VoutB.7 29.974,74.105 39.243,74.105 ; R7.1@43.288,74.041 43.224,74.105 39.243,74.105 ; R16.1 41.07,36.449 40.894,36.273 40.894,35.687 35.433,30.226 9.652,30.226 8.763,31.115 8.763,53.34 9.144,53.721 37.211,53.721 39.243,55.753 39.243,74.105
NetR7_2: R7.2 R8.1 | length 6.4
  Top Layer w0.3: R7.2 50.587,74.041 R8.1
NetR9_1: R9.1 R14.1 Vsup.7 | length 42.3
  Top Layer w0.3: Vsup.7 32.004,43.688 32.385,43.307 37.084,43.307 38.354,42.037 41.48,42.037 41.656,42.213 41.656,43.18 ; R9.1@43.343,68.58 41.656,68.58 41.656,43.18 ; R14.1@43.527,42.799 42.722,42.799 42.72,42.796 42.04,42.796 41.656,43.18
NetR9_2: R9.2 R10.1 | length 7.6
  Top Layer w0.3: R9.2@44.27,68.58 R10.1
NetR12_1: R12.1 R15.2 R17.2 U3.4 | length 23.9
  Top Layer w0.3: R15.2 57.145,42.799 57.582,42.362 58.42,42.362 58.42,40.005 ; R17.2 53.721,36.451 53.855,36.585 53.857,36.585 55.245,37.973 58.039,37.973 58.42,38.354 58.42,40.005 ; R12.1 62.357,35.941 62.039,36.259 U3.4 58.42,40.005
NetR12_2: R12.2 R21.1 U3.5 | length 18.8
  Top Layer w0.3: R12.2 66.929,35.941 67.186,36.198 67.186,37.809 66.739,38.255 U3.5 74.168,40.005 75.819,41.656 75.819,41.783 R21.1
NetR13_1: R13.1 R20.2 R21.2 U4.8 | length 42.7
  Top Layer w0.3: R21.2 89.027,41.783 ; R20.2 88.851,30.353 89.027,30.529 89.027,41.783 ; R13.1 97.349,34.516 96.675,34.516 95.504,35.687 95.504,41.402 95.885,41.783 U4.8 97.981,42.481 97.536,42.926 91.186,42.926 90.043,41.783 89.027,41.783
NetR14_2: R14.2 R15.1 | length 8.2
  Top Layer w0.3: R14.2@44.577,42.799 R15.1
NetR16_2: R16.2 R17.1 | length 8
  Top Layer w0.3: R16.2 R17.1
NetR18_1: R18.1 R20.1 R22.2 | length 7.9
  Top Layer w0.3: R22.2 81.153,30.367 ; R18.1 81.153,30.367 ; R20.1 81.167,30.353 81.153,30.367
NetR19_1: R19.1 R23.2 UComp.1 | length 14.1
  Top Layer w0.3: R23.2 101.092,23.642 ; R19.1 101.092,23.642 ; UComp.1 105.984,18.222 105.156,19.05 105.156,23.368 104.882,23.642 101.092,23.642
NetR22_1: R22.1 R24.1 | length 3.3
  Top Layer w0.3: R24.1 R22.1
NetResistance_1: "Series Resistor Input.1" Resistance.1 | length 34.7
  Top Layer w0.3: 16.51,15.922 50.466,15.922 50.673,16.129 Resistance.1
NetResistance_4: "Series Resistor Input.2" Resistance.4 | length 35.2
  Top Layer w0.3: 16.51,10.922 47.117,10.922 48.514,12.319 Resistance.4
NetResistance_7: Resistance.7 UComp.3 | length 51.9
  Top Layer w0.3: Resistance.7 105.537,14.859 105.918,15.24 105.918,16.146 106.094,16.322 UComp.3
"NetSupply Voltage Input_1": "Supply Voltage Input.1" Vsup.1 | length 9.2
  Top Layer w0.3: 15.875,44.323 21.59,44.323 22.225,44.958 Vsup.1
"NetSupply Voltage Input_2": "Supply Voltage Input.2" Vsup.4 | length 9.7
  Top Layer w0.3: 15.875,39.323 20.019,39.323 21.844,41.148 Vsup.4
pads on no net: Resistance.2 Resistance.3 U1.3 U1.4 U1.5 U2.3 U2.4 U2.5 U3.1 U3.7 U3.8 U4.3 U4.4 U4.5 VoutB.2 VoutB.3 Vsup.2 Vsup.3

## Polygon pours and split planes (outlines as drawn)
GND on GND "GND_L04_P000" (solid, pour order 0): -0.635,-0.635 0,0 0,100.457 151.003,100.457 151.003,0.381
-5 on -5 V (split plane): 151.255,-0.125 -0.125,-0.125 -0.125,100.455 151.255,100.455
+5 on +5 V (split plane): 151.255,-0.125 -0.125,-0.125 -0.125,100.455 151.255,100.455